# Altium PCB PuenteHay_Placa.PcbDoc
Units mm, origin at the board's own origin, x right, y up, seen from the top; angles counter-clockwise.
Board outline 50 x 50 mm, 2 copper layers (Top Layer, Bottom Layer); 29 components, 18 nets, 73 pads, 0 vias.
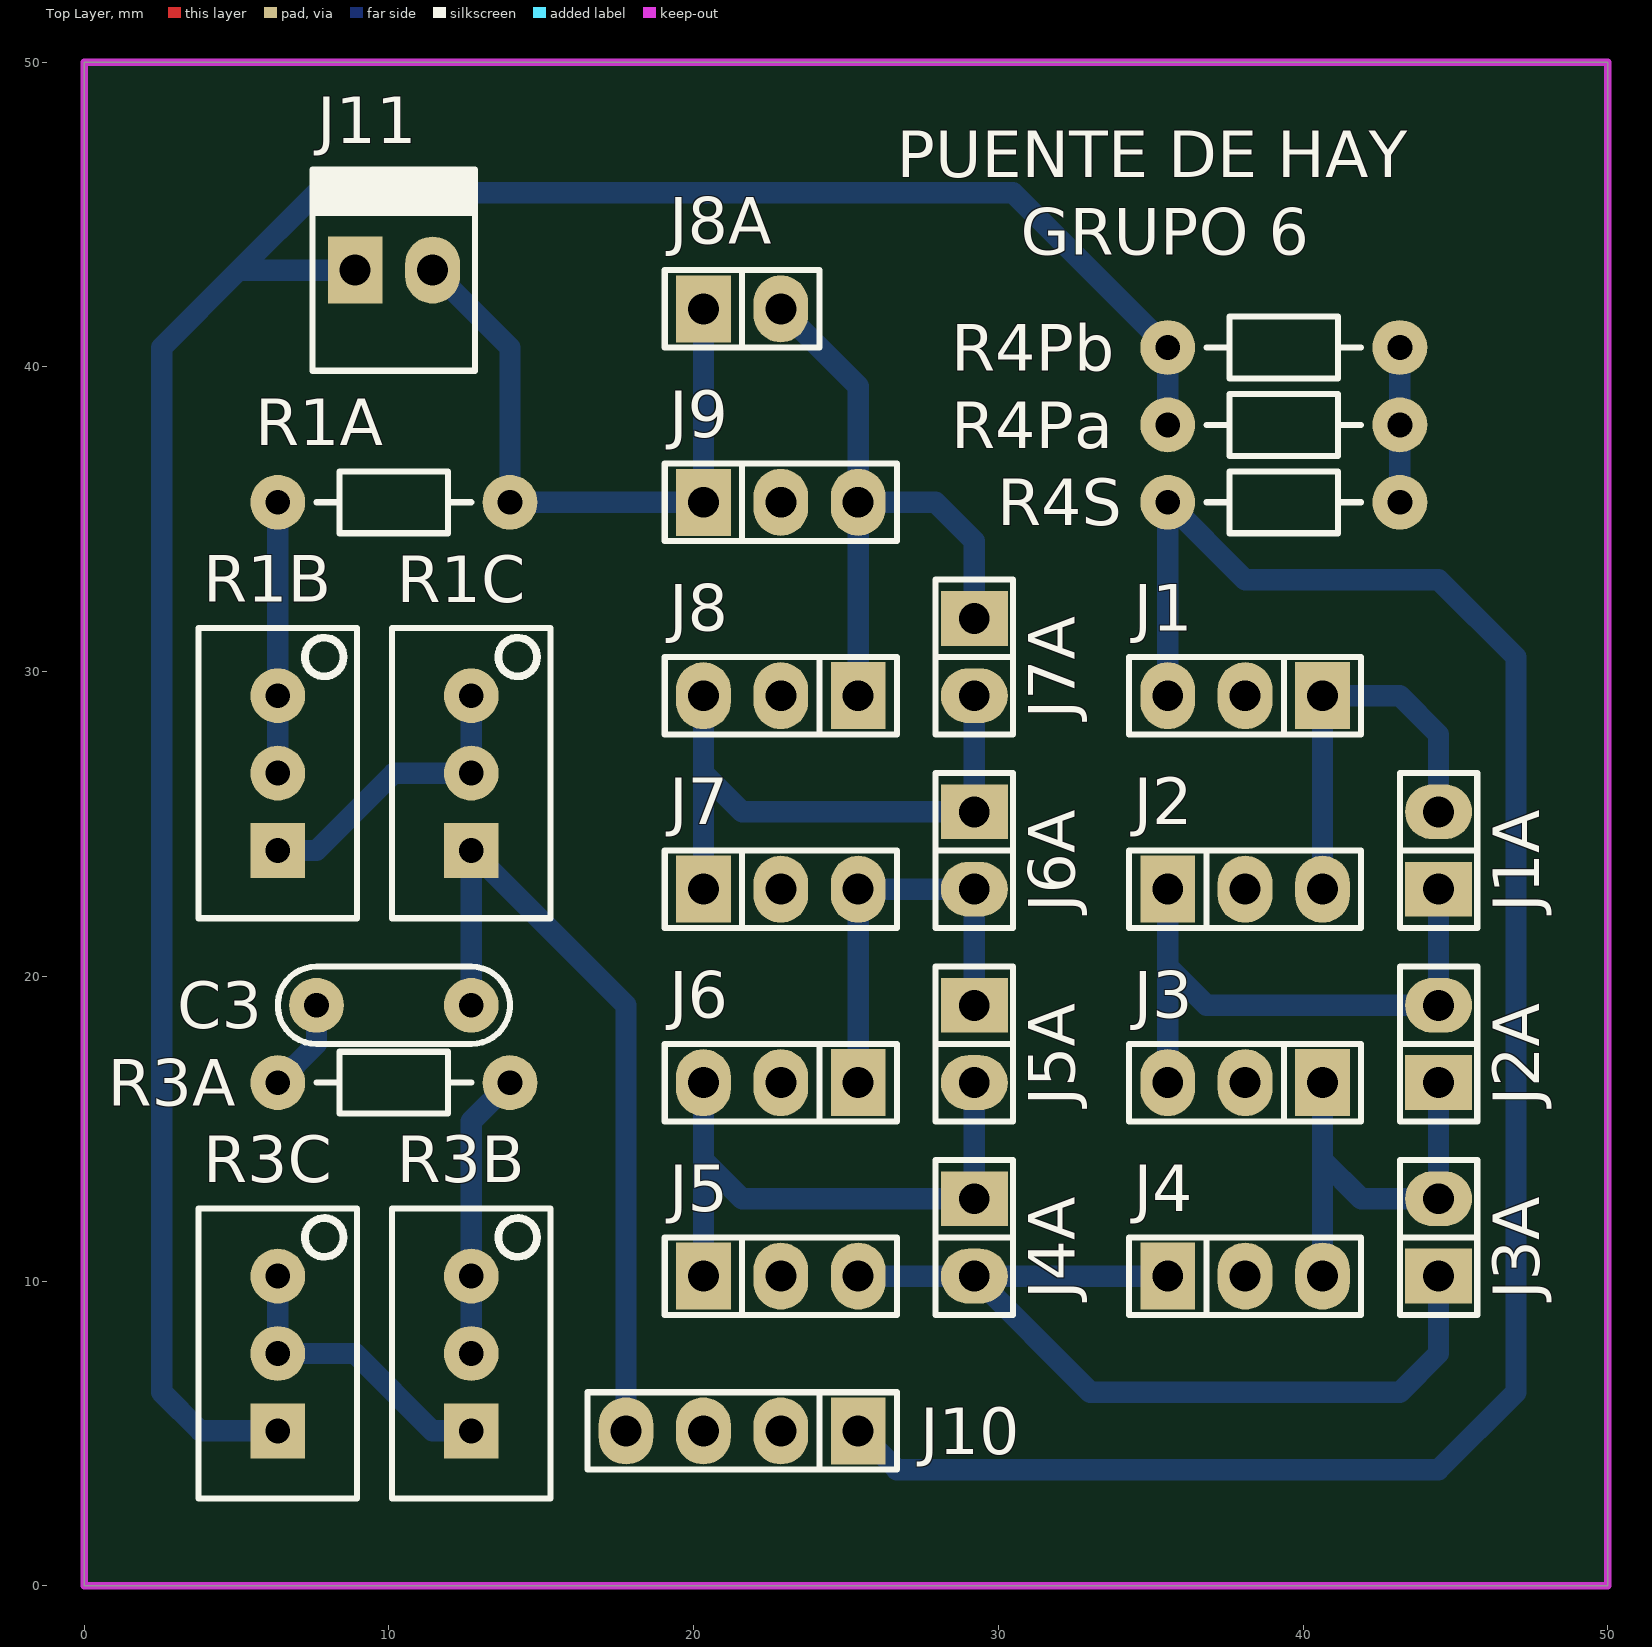
[diagram p0: Top Layer view]
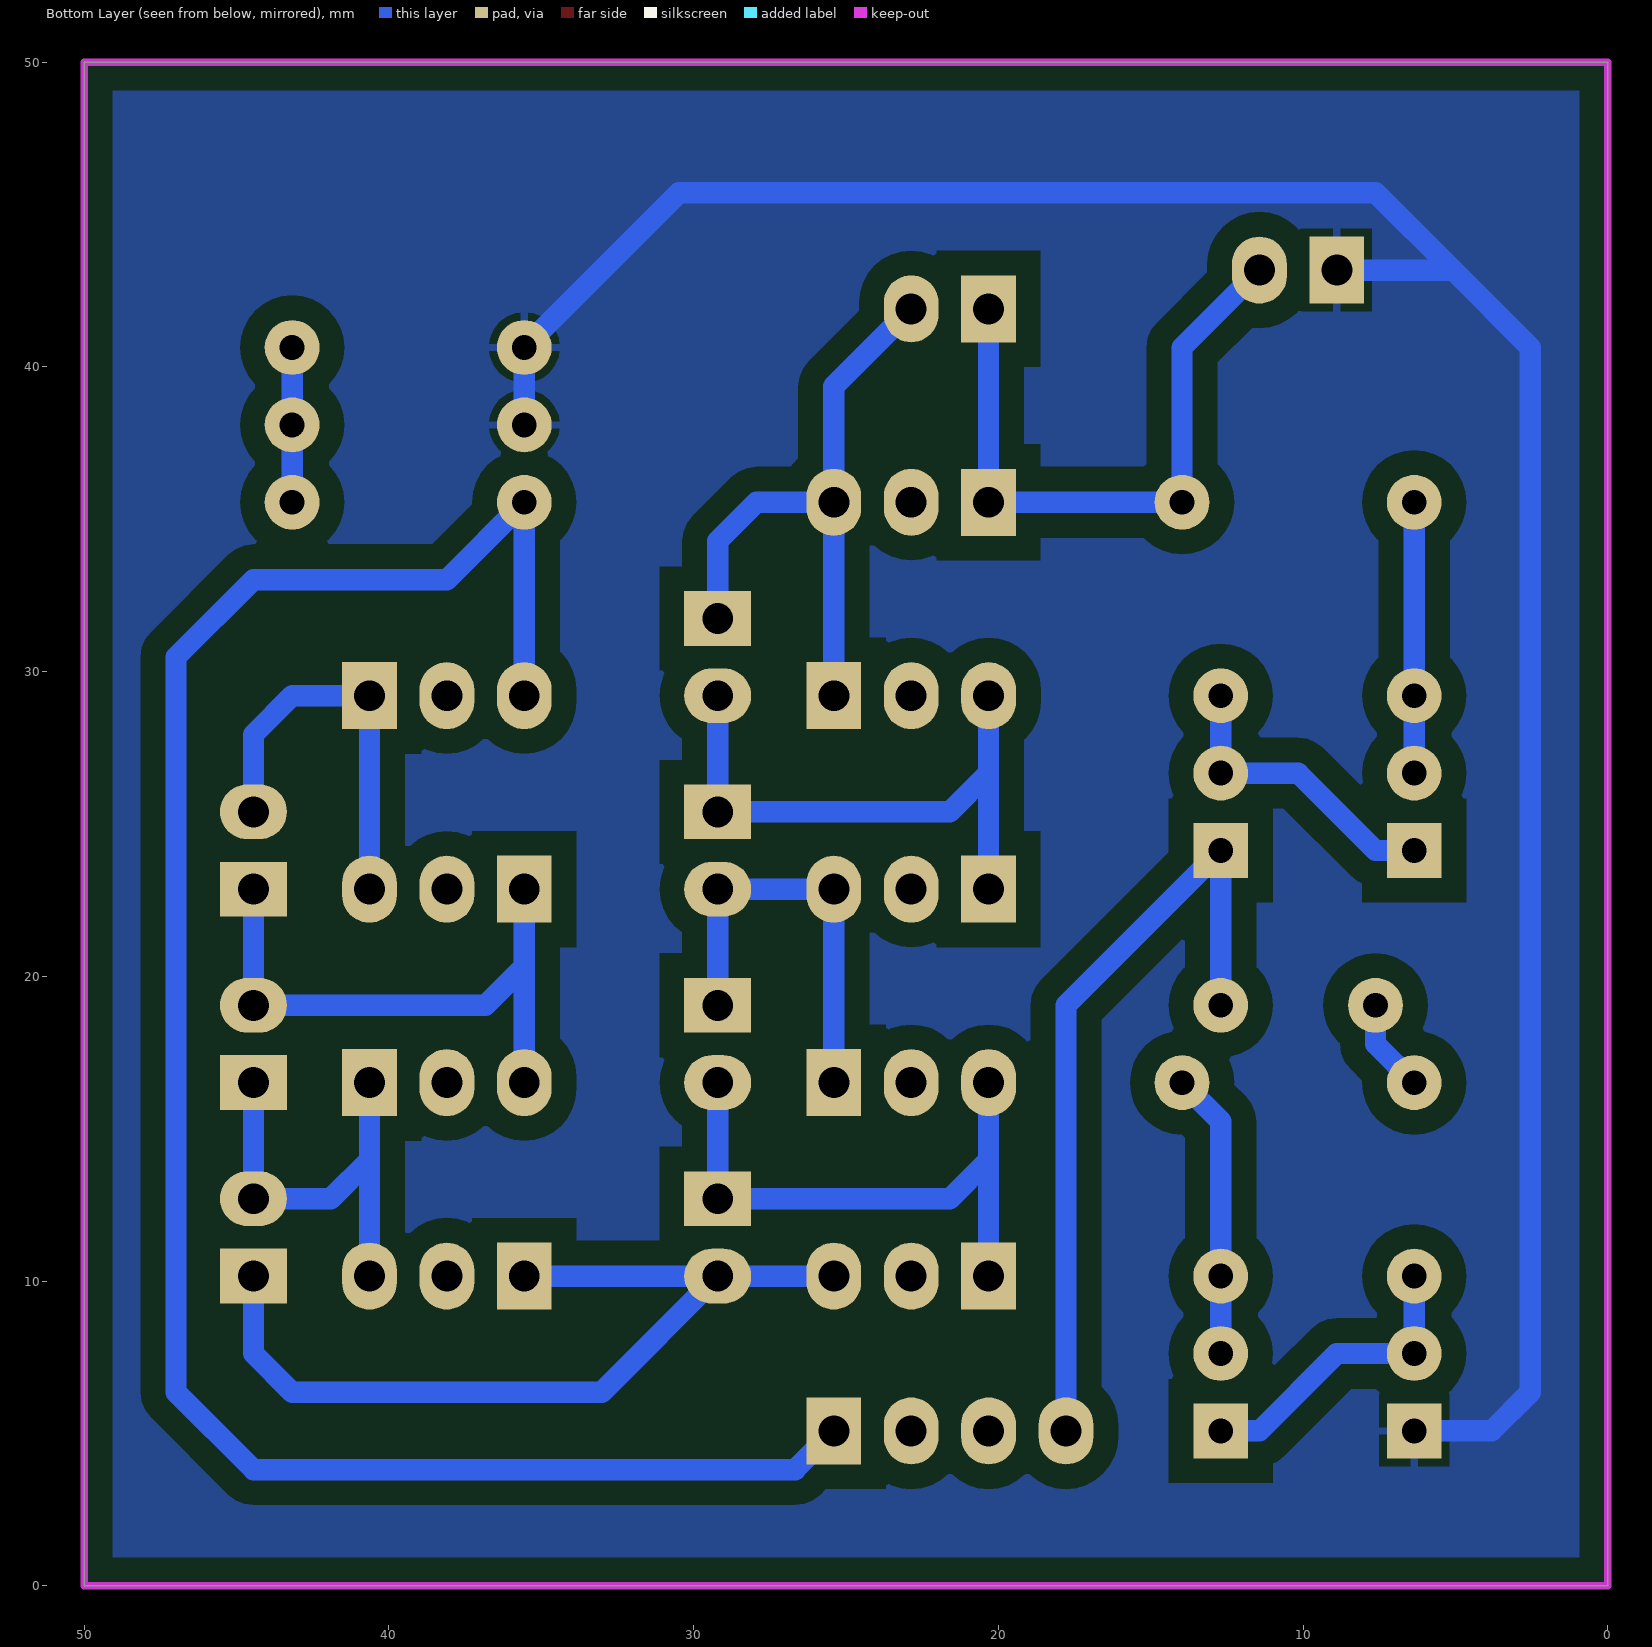
[diagram p1: Bottom Layer view, seen from below]
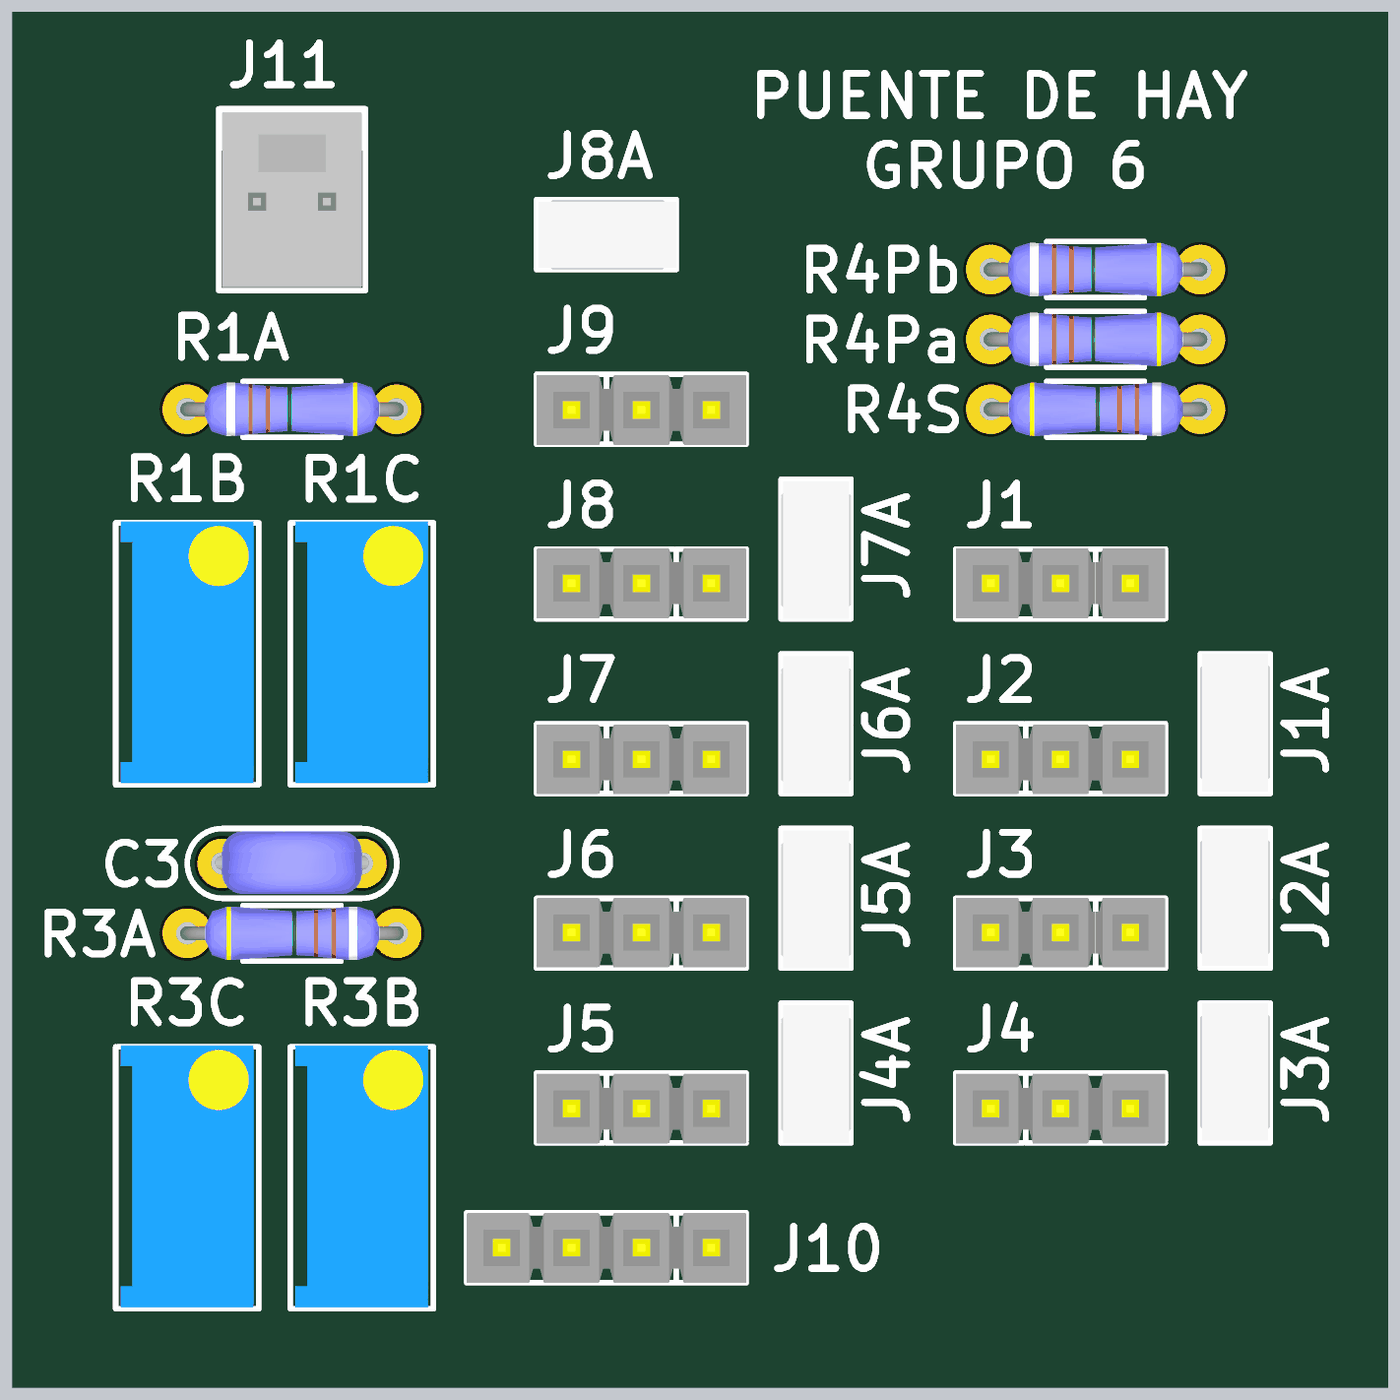
[diagram p2: 3D render of the assembled board from above, using the file's embedded part models]

## Layer stack, top to bottom
Top Solder: solder mask 0.0102, Solder Resist, Dk 3.5
Top Layer: signal copper 0.0356
Dielectric 1: dielectric 0.32, FR-4, Dk 4.8
Bottom Layer: signal copper 0.0356
Bottom Solder: solder mask 0.0102, Solder Resist, Dk 3.5

## Board outline
0,0 0,50 50,50 50,0

## Design rules (kind name [scope] priority, off if disabled: settings)
Clearance [All] p1: gap=0.7
PolygonConnect [All] p1: connectstyle=Relief reliefconductorwidth=0.254 reliefentries=4 polygonreliefangle="90 Angle" airgapwidth=0.254
RoutingVias [All] p1: holewidth=0.711 width=1.27 viastyle="Through Hole" minholewidth=0.711 minwidth=1.27 maxholewidth=0.711 maxwidth=1.27
SolderMaskExpansion [All] p1: expansion=0.102
Width [All] p1: maxlimit=0.7 minlimit=0.7 preferedwidth=0.7
30 further rules are at their usual default settings.

## Components (designator, comment, footprint, x,y, rotation, side; value= is the part's Value field where it differs from the comment)
C3 "CAP" CAP200 10.16,19.05 r180 top
J1 "L1" SIP3 38.1,29.21 r180 top
J1A "JUMPER" JUMPER2 44.45,24.13 r90 top
J2 "L2" SIP3 38.1,22.86 r0 top
J2A "JUMPER" JUMPER2 44.45,17.78 r90 top
J3 "L3" SIP3 38.1,16.51 r180 top
J3A "JUMPER" JUMPER2 44.45,11.43 r90 top
J4 "L4" SIP3 38.1,10.16 r0 top
J4A "JUMPER" JUMPER2 29.21,11.43 r270 top
J5 "L5" SIP3 22.86,10.16 r0 top
J5A "JUMPER" JUMPER2 29.21,17.78 r270 top
J6 "L6" SIP3 22.86,16.51 r180 top
J6A "JUMPER" JUMPER2 29.21,24.13 r270 top
J7 "L7" SIP3 22.86,22.86 r0 top
J7A "JUMPER" JUMPER2 29.21,30.48 r270 top
J8 "L8" SIP3 22.86,29.21 r180 top
J8A "JUMPER" JUMPER2 21.59,41.91 r0 top
J9 "L9" SIP3 22.86,35.56 r0 top
J10 "Vd" SIP4 21.59,5.08 r180 top
J11 "VIN" MOLEX2 8.89,43.18 r0 top
R1A "RES" RES300 6.35,35.56 r0 top
R1B "PRESET" "PRESET V" 6.35,26.67 r90 top
R1C "PRESET" "PRESET V" 12.7,26.67 r90 top
R3A "RES" RES300 13.97,16.51 r180 top
R3B "PRESET" "PRESET V" 12.7,7.62 r90 top
R3C "PRESET" "PRESET V" 6.35,7.62 r90 top
R4Pa "RES" RES300 35.56,38.1 r0 top
R4Pb "RES" RES300 35.56,40.64 r0 top
R4S "RES" RES300 43.18,35.56 r180 top

## Footprints (in the part's own frame and the unit in brackets; to place one, negate y for a bottom-side part, rotate by r counter-clockwise, add the part's x,y. Pads: shape width x height; smd on the part's side, far side on the other; paste and mask are expansions set on the pad)
CAP200 [mm]
  round 1.8 hole 0.813: 1(-2.54,0) 2(2.54,0)
  silkscreen extent -3.81,-1.27 3.81,1.27, body extent -2.79,-1.17 2.79,1.12, height 6.24
JUMPER2 [mm]
  rect 1.8x2.2 hole 1.016: 1(-1.27,0)
  oval 1.8x2.2 hole 1.016: 2(1.27,0)
  silkscreen extent -2.54,-1.27 2.54,1.27, body extent -2.46,-1.27 2.54,1.27, height 9.5
MOLEX2 [mm]
  rect 1.8x2.2 hole 1.016: 1(0,0)
  oval 1.8x2.2 hole 1.016: 2(2.54,0)
  silkscreen extent -1.4,-3.3 3.94,3.3, body extent -1.27,-3.17 3.81,3.17, height 10.74
"PRESET V" [mm]
  rect 1.8x1.8 hole 0.813: 1(-2.54,0)
  round 1.8 hole 0.813: 2(0,0) 3(2.54,0)
  silkscreen extent -4.76,-2.6 4.76,2.6, body extent -4.7,-2.42 4.83,2.42, height 11.55
RES300 [mm]
  round 1.8 hole 0.813: 1(0,0) 2(7.62,0)
  silkscreen extent 1.27,-1.02 6.35,1.02, body extent -0.25,-0.97 7.87,0.97, height 2.01
SIP3 [mm]
  rect 1.8x2.2 hole 1.016: 1(-2.54,0)
  oval 1.8x2.2 hole 1.016: 2(0,0) 3(2.54,0)
  silkscreen extent -3.81,-1.27 3.81,1.27, body extent -3.81,-1.3 3.81,1.24, height 8.38
SIP4 [mm]
  rect 1.8x2.2 hole 1.016: 1(-3.81,0)
  oval 1.8x2.2 hole 1.016: 2(-1.27,0) 3(1.27,0) 4(3.81,0)
  silkscreen extent -5.08,-1.27 5.08,1.27, body extent -5.08,-1.27 5.08,1.27, height 8.38

## Part data
J1 J2 J3 J4 J5 J6 J7 J8 J9: library part CON3
J10: library part CON4
J11: library part MOLEX2

## Nets (pads, with @x,y where several pads share a name; then routed paths per layer and width w, separated by ;. In a path a pad name is that pad's centre, name@x,y a point inside that pad or via, vN(x,y) a via of type N, cw(c..) or ccw(c..) an arc to the next point about the centre after c; other vN are vias at no path point)
GND: J11.1 R3C.1 R4Pa.1 R4Pb.1 | length 82.2
  Bottom Layer w0.7: R3C.1 3.81,5.08 2.54,6.35 2.54,40.64 5.08,43.18 ; J11.1 5.08,43.18 ; R4Pa.1 R4Pb.1 30.48,45.72 7.62,45.72 5.08,43.18
NetC3_1: C3.1 J10.4 R1C.1 | length 26.2
  Bottom Layer w0.7: C3.1 R1C.1 17.78,19.05 J10.4
NetC3_2: C3.2 R3A.2 | length 3.1
  Bottom Layer w0.7: R3A.2 7.62,17.78 C3.2
NetJ1_1: J1.1 J1A.2 J2.3 | length 13.2
  Bottom Layer w0.7: J2.3 J1.1 43.18,29.21 44.45,27.94 J1A.2
NetJ1_3: J1.3 J10.1 R4S.2 | length 67.2
  Bottom Layer w0.7: J10.1 26.67,3.81 44.45,3.81 46.99,6.35 46.99,30.48 44.45,33.02 38.1,33.02 R4S.2 J1.3
NetJ1A_1: J1A.1 J2.1 J2A.2 J3.3 | length 19.6
  Bottom Layer w0.7: J3.3 35.56,20.32 ; J2.1 35.56,20.32 ; J1A.1 J2A.2 36.83,19.05 35.56,20.32
NetJ2A_1: J2A.1 J3.1 J3A.2 J4.3 | length 14.5
  Bottom Layer w0.7: J4.3 40.64,13.97 ; J3.1 40.64,13.97 ; J2A.1 J3A.2 41.91,12.7 40.64,13.97
NetJ3A_1: J3A.1 J4.1 J4A.2 J5.3 | length 30
  Bottom Layer w0.7: J5.3 J4A.2 ; J4.1 J4A.2 ; J3A.1 44.45,7.62 43.18,6.35 33.02,6.35 J4A.2
NetJ4A_1: J4A.1 J5.1 J5A.2 J6.3 | length 19.6
  Bottom Layer w0.7: J5.1 20.32,13.97 ; J6.3 20.32,13.97 ; J5A.2 J4A.1 21.59,12.7 20.32,13.97
NetJ5A_1: J5A.1 J6.1 J6A.2 J7.3 | length 14
  Bottom Layer w0.7: J6.1 J7.3 J6A.2 J5A.1
NetJ6A_1: J6A.1 J7.1 J7A.2 J8.3 | length 19.6
  Bottom Layer w0.7: J7.1 20.32,26.67 ; J8.3 20.32,26.67 ; J7A.2 J6A.1 21.59,25.4 20.32,26.67
NetJ7A_1: J7A.1 J8.1 J8A.2 J9.3 | length 20.6
  Bottom Layer w0.7: J8A.2 25.4,39.37 J9.3 ; J8.1 J9.3 ; J7A.1 29.21,34.29 27.94,35.56 J9.3
NetR1A_1: R1A.1 R1B.2 R1B.3 | length 8.9
  Bottom Layer w0.7: R1B.2 R1B.3 R1A.1
NetR1B_1: R1B.1 R1C.2 R1C.3 | length 9.9
  Bottom Layer w0.7: R1B.1 7.62,24.13 10.16,26.67 R1C.2 R1C.3
NetR3A_1: R3A.1 R3B.2 R3B.3 | length 9.4
  Bottom Layer w0.7: R3B.2 R3B.3 12.7,15.24 R3A.1
NetR3B_1: R3B.1 R3C.2 R3C.3 | length 9.9
  Bottom Layer w0.7: R3C.3 R3C.2 8.89,7.62 11.43,5.08 R3B.1
NetR4Pa_2: R4Pa.2 R4Pb.2 R4S.1 | length 5.1
  Bottom Layer w0.7: R4S.1 R4Pa.2 R4Pb.2
VIN: J8A.1 J9.1 J11.2 R1A.2 | length 21.4
  Bottom Layer w0.7: J11.2 13.97,40.64 R1A.2 J9.1 J8A.1
pads on no net: J1.2 J2.2 J3.2 J4.2 J5.2 J6.2 J7.2 J8.2 J9.2 J10.2 J10.3

## Polygon pours and split planes (outlines as drawn)
GND on Bottom Layer "Top Overlay-No Net" (solid, remove dead copper, pour order 6): 0,50 50,50 50,0 0,0

## Keep-outs
Keep-Out Layer:
  the board outline again, w0.254

## Silkscreen, mask and mechanical layers (free items; w line width, h text height)
Top Overlay:
  text "PUENTE DE HAY" at 26.67,46.228 h1.52
  text "GRUPO 6" at 30.734,43.688 h1.52